# Altium PCB codesanner.PcbDoc
Units mm, origin at the board's own origin, x right, y up, seen from the top; angles counter-clockwise.
Board outline 171.93 x 106.52 mm, 2 copper layers (Top Layer, Bottom Layer); 52 components, 52 nets, 205 pads, 165 vias.
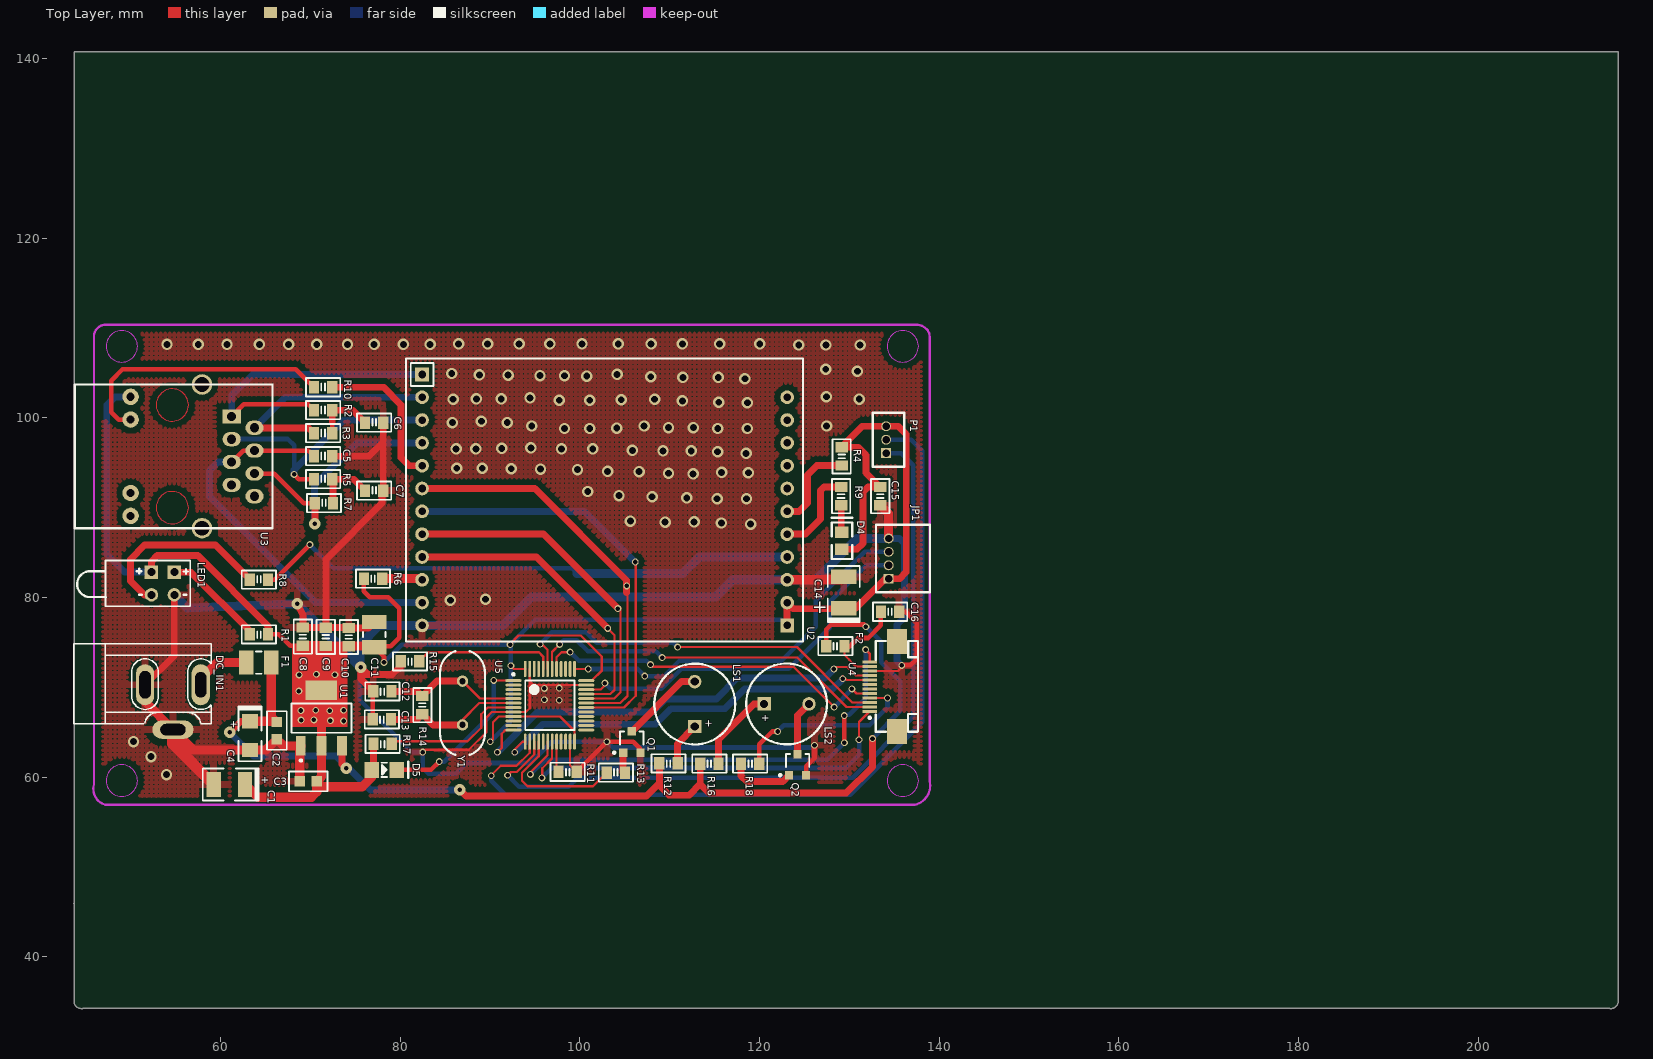
[diagram p0: Top Layer view]
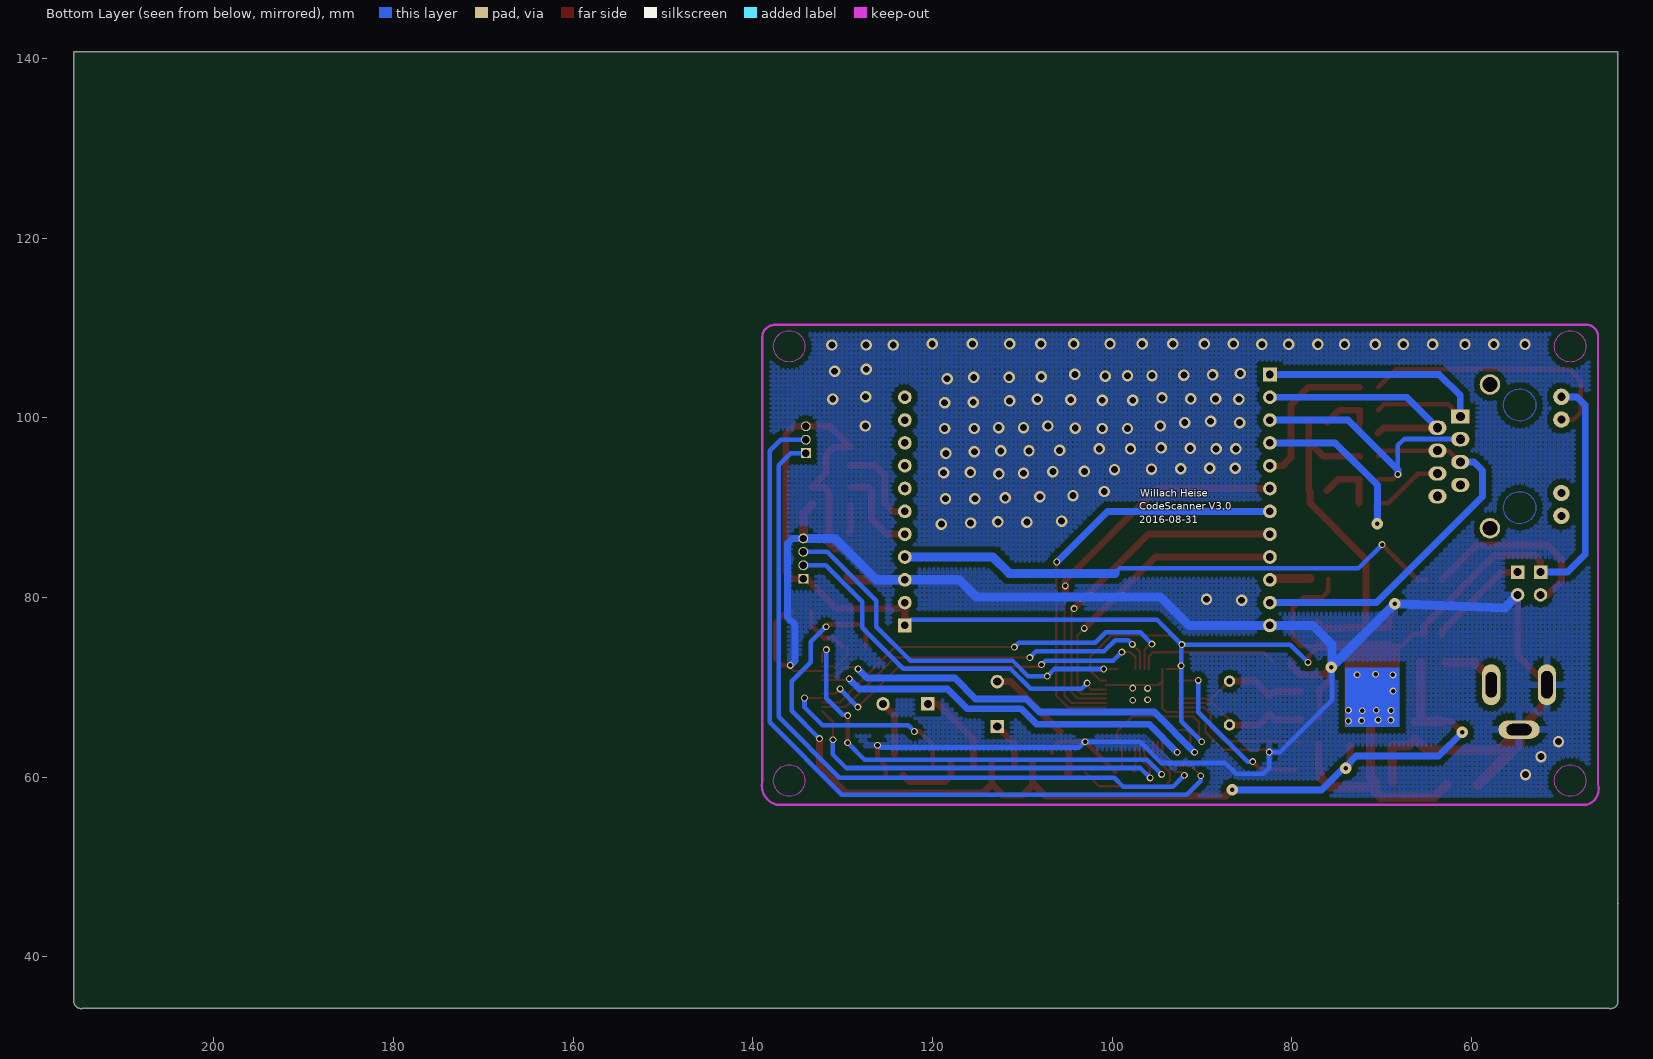
[diagram p1: Bottom Layer view, seen from below]

## Layer stack, top to bottom
Top Solder: solder mask 0.0102, Solder Resist, Dk 3.5
Top Layer: signal copper 0.0356
Dielectric 1: dielectric 0.32, FR-4, Dk 4.8
Bottom Layer: signal copper 0.0356
Bottom Solder: solder mask 0.0102, Solder Resist, Dk 3.5

## Board outline
43.701,34.902 ccw(c44.526,35.073) 44.644,34.239 cw(c44.651,34.189) 44.651,34.24 214.651,34.24 cw(c214.651,34.189) 214.658,34.239 ccw(c214.776,35.073) 215.6,34.902 215.6,45.888 cw(c215.651,45.888) 215.615,45.923 cw(c215.651,45.959) 215.6,45.959 215.6,140.753 43.701,140.753 43.701,45.959 cw(c43.651,45.959) 43.687,45.923 cw(c43.651,45.888) 43.701,45.888

## Design rules (kind name [scope] priority, off if disabled: settings)
Clearance Clearance_1 [InPolygon] p1: gap=0.635
Clearance [All] p2: gap=0.178
PolygonConnect [All] p1: connectstyle=Relief reliefconductorwidth=0.762 reliefentries=4 polygonreliefangle="90 Angle" airgapwidth=0.762
RoutingVias [All] p1: holewidth=0.711 width=1.27 viastyle="Through Hole" minholewidth=0.711 minwidth=1.27 maxholewidth=0.711 maxwidth=1.27
SolderMaskExpansion [All] p1: expansion=0.102
Width [All] p1: maxlimit=5 minlimit=0.254 preferedwidth=0.254
29 further rules are at their usual default settings.

## Components (designator, comment, footprint, x,y, rotation, side; value= is the part's Value field where it differs from the comment)
C1 "Cap Pol3" "B: 3528" 60.985,59.182 r180 top
C2 "Cap" 0805 66.269,65.176 r90 top
C3 "Cap" 0805 69.774,59.538 r0 top
C4 "Cap Pol3" "CAP A-3216" 63.297,64.618 r270 top
C5 "Cap" C0805tan 71.425,95.722 r180 top
C6 "Cap" C0805tan 77.114,99.466 r180 top
C7 "Cap" C0805tan 77.114,91.897 r180 top
C8 "Cap" C0805tan 69.183,75.644 r270 top
C9 "Cap" C0805tan 71.723,75.619 r270 top
C10 "Cap" C0805tan 74.289,75.594 r270 top
C11 "Cap Pol1" 3225[1210] 77.133,75.873 r90 top
C12 "Cap" C0805tan 78.029,69.545 r0 top
C13 "Cap" C0805tan 77.978,66.421 r0 top
C14 "Cap Pol3" "B: 3528" 129.388,80.543 r90 top
C15 "Cap" C0805tan 133.452,91.288 r90 top
C16 "Cap" C0805tan 134.544,78.41 r0 top
D4 "Ready" LED-0805 129.184,85.369 r90 top
D5 "Diode 1N4148" LL34 76.835,60.808 r0 top
DC_IN1 "POW" DC10B 47.142,66.091 r0 top
F1 "Fuse 1A" 3225[1210] 64.262,72.746 r0 top
F2 "Fuse 0.5A" C0805TAN 128.448,74.574 r0 top
JP1 "4 HEADER" CON4_1.5 134.391,84.328 r90 top
LED1 "LED_double_DIP" LED_double 52.324,82.829 r0 top
LS1 "Bell" Bell 112.801,65.634 r90 top
LS2 "Bell" Bell 120.523,68.148 r0 top
P1 "Header 3" CON3_1.5 134.112,97.561 r90 top
Q1 "S8050" SOT-23 105.791,63.906 r0 top
Q2 "S8050" SOT-23 124.257,61.392 r0 top
R1 "Res2" C0805TAN 64.287,75.895 r0 top
R2 "Res2" C0805TAN 71.425,100.843 r180 top
R3 "Res2" C0805TAN 71.425,98.283 r180 top
R4 "Res2" C0805TAN 129.159,95.707 r90 top
R5 "Res2" C0805TAN 71.425,93.167 r180 top
R6 "Res2" C0805TAN 76.987,82.093 r0 top
R7 "Res2" C0805TAN 71.526,90.5 r180 top
R8 "Res2" C0805TAN 64.287,81.991 r180 top
R9 "Res2" C0805TAN 129.108,91.288 r270 top
R10 "Res2" C0805TAN 71.425,103.403 r180 top
R11 "Res2" C0805tan 98.654,60.579 r0 top
R12 "Res2" C0805TAN 109.88,61.519 r0 top
R13 "Res2" C0805TAN 104.013,60.503 r180 top
R14 "Res2" C0805tan 82.474,68.021 r270 top
R15 "Res2" C0805tan 81.102,72.873 r0 top
R16 "Res2" C0805TAN 114.427,61.493 r0 top
R17 "Res2" C0805tan 78.054,63.703 r0 top
R18 "Res2" C0805TAN 118.974,61.493 r0 top
U1 "AMS1117-3.3" SOT223 71.247,66.573 r0 top
U2 "USR-WIFI232-D2" USR-WIFI232-D2 82.448,104.826 r180 top
U3 "HR911105A" HR911105A 56.896,95.707 r180 top
U4 "CR8000_12PIN" CR8000_12PIN 133.401,70.079 r90 top
U5 "STM32F103C8T6" LQFP48 96.672,67.996 r0 top
Y1 "8MHz" XTAL_US 86.944,70.688 r270 top

## Footprints (in the part's own frame and the unit in brackets; to place one, negate y for a bottom-side part, rotate by r counter-clockwise, add the part's x,y. Pads: shape width x height; smd on the part's side, far side on the other; paste and mask are expansions set on the pad)
0805 [mm] "1.14mm,1.2mm,3.05mm"
  rect 1.14x1.2 smd: 1(-0.95,0) 2(0.95,0)
  silkscreen extent -2.13,-1.12 2.16,1.09
3225[1210] [mm] "Chip Resistor; Body 3.2 x 2.5 mm (LxW typ)"
  rect 1.6x2.7 smd: 1(-1.4,0) 2(1.4,0)
  silkscreen extent -0.3,-1.25 0.3,1.25
"B: 3528" [mm] "钽电容B型"
  rect 1.6x2.8 smd: 1(-1.75,0) 2(1.75,0)
  silkscreen extent -3.27,-1.78 2.95,1.78
Bell [mm]
  rect 1.5x1.5 hole 0.9: 1(0,0)
  round 1.5 hole 0.9: 2(5,0)
  silkscreen extent -2,-4.5 7,4.5
C0805tan [mil]
  rect 45x55 smd: 1(-40,0) 2(40,0)
  silkscreen extent -75,-40 75,40
C0805TAN [mil]
  rect 45x55 smd: 1(-40,0) 2(40,0)
  silkscreen extent -75,-40 75,40
"CAP A-3216" [mm]
  rect 1.6x1.8 smd: 1(-1.6,0) 2(1.6,0)
  silkscreen extent -3.25,-1.27 2.85,1.27
CON3_1.5 [mm]
  rect 1.1x1.1 hole 0.8: 1(-1.5,0)
  round 1.1 hole 0.8: 2(0,0) 3(1.5,0)
  silkscreen extent -3,-2 3,1.5
CON4_1.5 [mm]
  rect 1.1x1.1 hole 0.8: 1(-2.25,0)
  round 1.1 hole 0.8: 2(-0.75,0) 3(0.75,0) 4(2.25,0)
  silkscreen extent -3.75,-4.6 3.75,1.4
CR8000_12PIN [mm]
  rect 0.3x1.6 smd: 1(-2.771,1.13) 2(-2.271,1.13) 3(-1.771,1.13) 4(-1.271,1.13) 5(-0.771,1.13) 6(-0.271,1.13) 7(0.229,1.13) 8(0.729,1.13) 9(1.229,1.13) 10(1.729,1.13) 11(2.229,1.13) 12(2.729,1.13)
  rect 2.8x2.2 smd: 13(-5.004,-1.905) 14(5.004,-1.905)
  silkscreen extent -5.03,-4.27 5.08,1.25
DC10B [mil]
  oval 80x180 hole 50 slot 110 at 90 deg: 1(420.09,165)
  oval 80x180 hole 50 slot 120 at 90 deg: 2(176,165)
  oval 180x80 hole 50 slot 110 at 0 deg: 3(298.05,-31.85)
  silkscreen extent -137,-5 466,345
HR911105A [mil]
  rect 80x62 hole 40: 1(-171.46,-175.2)
  oval 80x62 hole 40: 2(-271.46,-125.2) 3(-171.46,-75.2) 4(-271.46,-25.2) 5(-171.46,24.8) 6(-271.46,74.8) 7(-171.46,124.8) 8(-271.46,174.8)
  round 72 hole 36: 9(271.46,-260.83) 10(271.46,-161.2) 11(271.46,160.67) 12(271.46,260.8)
  round 90 hole 65: 13(-41.54,-314.96) 14(-41.54,314.96)
  Multi-Layer circle w5: c88.54,-225.2 r70.8
  Multi-Layer circle w5: c88.54,224.8 r70.8
  silkscreen extent -350,-315 516,315
LED-0805 [mm]
  rect 1.3x1.5 smd: 1(0,0) 2(1.9,0)
  silkscreen extent -1.08,-1.14 3.49,1.14
LED_double [mm]
  rect 1.5x1.5 hole 0.9: 1(0,0) 4(2.54,0)
  round 1.5 hole 0.9: 2(0,-2.54) 3(2.54,-2.54)
  silkscreen extent -8.27,-3.81 4.32,1.27
LL34 [mm]
  rect 1.6x1.8 smd: 1(0,0) 2(2.8,0)
  silkscreen extent 1.1,-0.89 4.07,0.89
LQFP48 [mm]
  oval 1.8x0.3 smd: 1(-4.05,2.75) 2(-4.05,2.25) 3(-4.05,1.75) 4(-4.05,1.25) 5(-4.05,0.75) 6(-4.05,0.25) 7(-4.05,-0.25) 8(-4.05,-0.75) 9(-4.05,-1.25) 10(-4.05,-1.75) 11(-4.05,-2.25) 12(-4.05,-2.75) 25(4.05,-2.75) 26(4.05,-2.25) 27(4.05,-1.75) 28(4.05,-1.25) 29(4.05,-0.75) 30(4.05,-0.25) 31(4.05,0.25) 32(4.05,0.75) 33(4.05,1.25) 34(4.05,1.75) 35(4.05,2.25) 36(4.05,2.75)
  oval 0.3x1.8 smd: 13(-2.75,-4.05) 14(-2.25,-4.05) 15(-1.75,-4.05) 16(-1.25,-4.05) 17(-0.75,-4.05) 18(-0.25,-4.05) 19(0.25,-4.05) 20(0.75,-4.05) 21(1.25,-4.05) 22(1.75,-4.05) 23(2.25,-4.05) 24(2.75,-4.05) 37(2.75,4.05) 38(2.25,4.05) 39(1.75,4.05) 40(1.25,4.05) 41(0.75,4.05) 42(0.25,4.05) 43(-0.25,4.05) 44(-0.75,4.05) 45(-1.25,4.05) 46(-1.75,4.05) 47(-2.25,4.05) 48(-2.75,4.05)
  silkscreen extent -4.17,-2.75 2.75,3.57, body extent -3.5,-3.5 3.5,3.5, height 1.6
SOT223 [mm] "SOT-223/SC-73; 4 Leads; Body 6.7 x 7.3 mm, inc. leads (LxW max)"
  rect 1.1x2.15 smd: 1(-2.3,-3.1) 2(0,-3.1) 3(2.3,-3.1)
  rect 3.5x2.15 smd: 4(0,3.1)
  silkscreen extent -3.35,-4.85 3.35,1.63
SOT-23 [mm]
  rect 0.9x0.95 smd: 1(-0.95,-1.175) 2(0.95,-1.175) 3(0,1.175)
  silkscreen extent -2.07,-1.3 1.3,1.18
USR-WIFI232-D2 [mil]
  rect 60x60 hole 33.47: 1(0,0) 13(-1600,1100)
  round 60 hole 33.47: 2(0,100) 3(0,200) 4(0,300) 5(0,400) 6(0,500) 7(0,600) 8(0,700) 9(0,800) 10(0,900) 11(0,1000) 12(0,1100) 14(-1600,1000) 15(-1600,900) 16(-1600,800) 17(-1600,700) 18(-1600,600) 19(-1600,500) 20(-1600,400) 21(-1600,300) 22(-1600,200) 23(-1600,100)
  silkscreen extent -1670,-70 70,1170
XTAL_US [mil]
  round 50 hole 28: 1(0,0) 2(192.13,0)
  silkscreen extent -131,-98 323,98

## Part data
C1 C4 C14: "Polarized Capacitor (Surface Mount)"
C2 C3 C5 C6 C7 C8 C9 C10 C12 C13 C15 C16: "Capacitor"
C11: "Polarized Capacitor (Radial)"
D4: library part LED2, "Typical RED, GREEN, YELLOW, AMBER GaAs LED"
D5: "High Conductance Fast Diode"
F1 F2: library part "Fuse 1", "Fuse"
JP1: "4 Pin Header"
LS1 LS2: "Electrical Bell"
P1: "Header, 3-Pin"
Q1 Q2: library part MMBT3904
R1 R2 R3 R4 R5 R6 R7 R8 R9 R10 R11 R12 R13 R14 R15 R16 R17 R18: "Resistor"
U1: library part AMS1117-5
Y1: library part XTAL, "Crystal Oscillator"

## Via types
v1: diameter 1.27, hole 0.762, Top Layer to Bottom Layer, 100 vias
v2: diameter 0.762, hole 0.508, Top Layer to Bottom Layer, 59 vias
v3: diameter 1.27, hole 0.508, Top Layer to Bottom Layer, 6 vias

## Nets (pads, with @x,y where several pads share a name; then routed paths per layer and width w, separated by ;. In a path a pad name is that pad's centre, name@x,y a point inside that pad or via, vN(x,y) a via of type N, cw(c..) or ccw(c..) an arc to the next point about the centre after c; other vN are vias at no path point)
1V8: C5.2 U2.11 U3.4 U3.5 | length 44.6
  Top Layer w0.508: U3.5 62.521,96.347 U3.4 ; U3.4@63.435,96.322 69.809,96.322 C5.2
  Bottom Layer w0.762: U3.5 59.746,95.077 58.776,94.107 58.776,91.211 70.561,79.426 U2.11
+3.3V: C1.1 C3.2 C8.2 C9.2 C10.2 C11.1 C14.1 C15.2 D4.1 D5.1 JP1.1 LED1.1 P1.3 R1.2 R4.2 R6.1 R17.1 U1.2 U1.4 U2.13 U2.14 U3.9 U5.9 U5.24 U5.36 U5.48 | length 256.1
  Top Layer w0.254: v2(90.043,63.932) 90.348,64.237 90.348,66.116 90.977,66.746 U5.9 97.795,66.746 99.422,65.119 U5.24 ; v2(92.253,74.752) 92.253,74.828 93.193,75.768 100.101,75.768 102.464,73.406 102.464,71.882 101.327,70.746 U5.36 ; v2(92.329,72.39) 92.673,72.046 U5.48
  Top Layer w0.508: R1.2 66.497,75.895 67.764,74.628 C8.2 ; R6.1 75.971,80.67 76.606,80.035 78.664,80.035 79.908,78.791 79.908,75.514 78.972,74.578 77.029,74.578 C11.1 78.207,73.4 v2(78.207,72.771)
  Top Layer w0.762: LED1.1 52.324,84.023 52.959,84.658 57.48,84.658 65.303,76.835 R1.2 ; D5.1@77.038,61.011 R17.1 ; U2.13 U2.14 123.774,78.74 129.334,78.74 C14.1 130.686,78.793 133.97,82.078 JP1.1 135.596,82.078 136.347,82.829 136.347,98.171 135.457,99.061 P1.3 131.497,99.061 R4.2 130.988,96.723 131.877,95.834 131.877,93.878 C15.2 132.105,92.304 131.521,91.719 131.521,86.03 130.861,85.369 D4.1
  Top Layer w1.016: C1.1 64.158,57.76 70.129,57.76 70.724,58.354 C3.2 ; C8.2 71.698,74.628 C9.2 ; D5.1 76.835,59.969 75.794,58.928 71.333,58.928 C3.2 ; C11.1@77.029,74.578 C10.2 74.263,74.603 C9.2 ; C3.2 71.247,60.061 U1.2 U1.4 71.247,74.127 C9.2
  Bottom Layer w0.508: v2(78.207,72.771) 80.188,74.752 v2(92.253,74.752) ; v2(90.043,63.932) 92.329,66.218 v2(92.329,72.39) 92.329,74.676 v2(92.253,74.752) ; U2.13 122.453,77.521 95.021,77.521 v2(92.253,74.752)
  Bottom Layer w0.762: U3.9 48.256,102.332 47.346,101.422 47.346,84.785 49.301,82.829 LED1.1
  other v2: 73.711,66.243 72.238,66.294 68.986,66.345 70.409,66.37 72.161,67.386 68.961,67.412 70.612,67.437 73.711,67.437 68.732,69.571 68.758,71.374 72.746,71.399 70.688,71.45
+5V: C2.2 C4.1 F1.2 F2.1 R12.1 R16.1 U1.3 | length 122.9
  Top Layer w0.508: F2.1@127.2,74.498 F2.1@127.2,74.574 ; F2.1 127.432,76.429 127.991,76.987 131.648,76.987 131.902,76.733 v2(131.851,76.733)
  Top Layer w0.762: v3(61.036,64.973) 62.281,66.218 C4.1 ; U1.3 73.547,61.429 v3(73.99,60.985) ; v3(86.639,58.572) 87.325,57.887 107.417,57.887 108.864,59.334 ; R12.1 108.864,59.334 ; R16.1 113.411,59.207 ; v2(132.588,64.287) 132.588,61.138 129.667,58.217 114.402,58.217 113.411,59.207 ; 108.864,59.334 108.864,59.055 109.931,57.988 112.192,57.988 113.411,59.207
  Top Layer w1.016: C4.1 C2.2@66.177,66.218 ; F1.2 65.662,66.733 C2.2@66.177,66.218 ; C2.2 C2.2@66.177,66.218
  Bottom Layer w0.508: v2(131.851,76.733) 131.902,76.733 133.579,75.057 133.579,72.771 135.687,70.663 135.687,67.386 v2(132.588,64.287)
  Bottom Layer w0.762: v3(61.036,64.973) 63.678,62.332 72.847,62.332 v3@73.99,61.189 ; v3@73.99,61.29 76.708,58.572 v3(86.639,58.572)
+5V_CODE: C16.1 F2.2 U4.11 | length 10.3
  Top Layer w0.254: F2.2 129.464,73.609 130,73.073 130.766,72.307 U4.11
  Top Layer w0.508: F2.2@130,74.498 130.991,75.489 132.105,75.489 133.528,76.911 C16.1
+5V_IN: DC_IN1.1 F1.1 | length 6.5
  Top Layer w1.016: DC_IN1.1 57.813,70.945 59.614,72.746 F1.1
BEEP_CODE: R18.2 U4.4 | length 21.2
  Top Layer w0.254: U4.4 134.263,68.807 v2(134.264,68.809)
  Top Layer w0.508: R18.2 119.99,63.652 121.412,65.075 v2(122.022,65.075)
  Bottom Layer w0.508: v2@121.996,65.049 v2(122.022,65.075) 122.707,65.761 132.258,65.761 134.264,67.767 v2(134.264,68.809)
BEEP_PA6: R13.2 U5.16 | length 15.4
  Top Layer w0.254: U5.16 95.422,62.326 93.574,60.477 93.574,59.588 94.183,58.979 101.473,58.979 R13.2
CTS1: U2.8 U5.32 | length 38.4
  Top Layer w0.254: U5.32 103.849,68.746 104.546,69.444 104.546,78.537
  Top Layer w0.762: U2.8 95.961,87.046 v2(104.242,78.765)
ETH7: U3.7
ETH8: U3.8
G_LED_PA4: P1.2 U5.14 | length 93.9
  Top Layer w0.254: v2(90.145,60.147) 90.145,60.198 91.211,61.265 92.964,61.265 94.422,62.723 U5.14
  Bottom Layer w0.508: v2(90.145,60.147) 90.145,59.614 91.719,58.039 130.099,58.039 138.151,66.091 138.151,96.317 136.906,97.561 P1.2
GND: C1.2 C2.1 C3.1 C4.2 C5.1 C6.1 C7.1 C8.1 C9.1 C10.1 C11.2 C12.1 C13.1 C14.2 C15.1 C16.2 DC_IN1.2 DC_IN1.3 JP1.4 LED1.3 Q1.2 Q2.2 R11.2 R15.1 U1.1 U2.12 U2.15 U4.10 U5.8 U5.23 U5.35 U5.47 | length 332.8
  Top Layer w0.254: v2(82.525,62.789) 82.779,63.043 87.655,63.043 89.611,64.999 89.611,66.65 90.207,67.246 U5.8 93.992,67.246 94.422,67.676 94.422,70.688 ; U5.47 94.422,70.688 ; U5.23 98.922,61.326 R11.2 ; U5.35 94.865,70.246 94.422,70.688 ; U4.10 135.434,71.807 135.839,72.212 v2(135.839,72.441)
  Top Layer w0.508: C13.1 76.962,69.494 C12.1 ; R11.2 v2(103.022,63.932) 105.969,63.932 106.741,63.16 Q1.2 ; Q2.2 125.207,61.199 126.136,62.128 v2(126.136,63.551) ; C16.2 136.296,78.41 137.516,77.191 137.516,73.152 136.804,72.441 v2(135.839,72.441)
  Top Layer w0.762: DC_IN1.2 54.864,73.533 LED1.3 ; v3(68.555,79.299) 69.183,78.086 C8.1 C9.1@71.755,76.66 ; C5.1 76.52,95.722 78.13,97.333 ; C12.1 75.641,70.917 v3(75.641,72.212) ; C11.2 76.47,76.61 C10.1 74.238,76.66 C9.1@71.755,76.66 ; C6.1 78.13,97.333 ; R15.1 80.086,72.39 79.121,71.425 76.429,71.425 ; C9.1@71.755,76.66 71.755,84.252 78.003,90.5 78.003,91.77 C7.1 78.13,97.333 ; v3(75.641,72.212) 75.844,71.425 76.429,71.425 ; v3(75.641,72.212) 76.429,71.425
  Top Layer w1.016: DC_IN1.2 51.613,68.382 DC_IN1.3 ; 55.78,64.215 56.977,63.018 C4.2 65.06,63.018 C2.1 67.022,63.473 U1.1 68.824,63.35 C3.1 ; U2.15 129.06,81.966 C14.2 ; C15.1 134.391,89.332 JP1.4
  Top Layer w1.27: DC_IN1.3 54.713,63.705 C1.2
  Bottom Layer w0.508: v3(75.641,72.212) 75.54,72.111 75.54,68.555 81.305,62.789 v2(82.525,62.789) 82.525,61.011 83.16,60.376 86.208,60.376 87.401,61.57 94.539,61.57 96.901,63.932 v2(103.022,63.932) 103.657,63.297 125.882,63.297 v2(126.136,63.551)
  Bottom Layer w0.762: JP1.4 135.596,86.578 136.144,86.03 136.144,77.775 135.331,76.962 135.331,72.949 v2(135.839,72.441)
  Bottom Layer w1.016: LED1.3 56.337,78.816 v3(68.555,79.299) v3@75.54,72.314 ; v3(75.641,72.212) v3@75.54,72.314 ; JP1.4 130.876,86.578 126.263,81.966 U2.15 117.043,81.966 115.113,80.035 94.615,80.035 91.465,76.886 U2.12 77.673,76.886 75.54,74.752 v3@75.54,72.314
  other v1: 54,60.274 52.273,62.281 50.317,63.957 85.598,79.68 89.51,79.807 119.024,88.163 115.773,88.29 109.499,88.392 112.725,88.417 105.639,88.494 115.291,90.983 118.567,90.983 111.912,91.084 108.052,91.211 104.369,91.338 100.889,91.796 112.624,93.751 109.88,93.828 118.77,93.878 115.799,93.929 106.604,94.005 103.099,94.031 99.746,94.234 95.631,94.285 92.38,94.336 86.309,94.386 89.154,94.386 118.516,96.037 115.341,96.215 109.271,96.317 112.42,96.317 105.867,96.368 86.233,96.545 88.443,96.545 97.968,96.545 101.448,96.545 91.313,96.596 94.564,96.647 98.298,98.806 101.117,98.806 115.367,98.806 118.669,98.806 104.115,98.857 109.88,98.908 112.649,98.908 94.666,99.085 107.163,99.085 127.483,99.085 85.827,99.466 91.923,99.466 89.052,99.619 118.669,101.676 115.468,101.727 111.43,101.879 97.714,101.956 101.117,101.956 104.623,102.006 85.903,102.057 108.331,102.057 131.115,102.083 88.494,102.108 91.262,102.108 94.463,102.21 127.457,102.337 118.389,104.343 111.481,104.496 115.418,104.496 107.899,104.572 100.787,104.648 98.298,104.673 95.58,104.699 92.024,104.75 88.824,104.775 104.165,104.826 85.75,104.927 130.912,105.181 127.381,105.41 124.384,108.102 127.406,108.102 131.216,108.102 54.051,108.179 57.531,108.179 60.731,108.179 64.338,108.179 67.589,108.179 70.714,108.179 74.143,108.179 77.114,108.179 80.366,108.179 83.337,108.179 86.512,108.229 89.738,108.229 93.243,108.229 96.672,108.229 100.254,108.229 104.292,108.229 107.95,108.229 111.43,108.229 115.57,108.229 120.04,108.229
  other v2: 97.714,68.555 96.063,68.605 96.063,69.875 97.714,69.901
NET1_LED: R10.1 U2.5 | length 17.1
  Top Layer w0.762: R10.1 78.156,103.403 80.112,101.448 80.112,95.555 81.001,94.666 U2.5
NetC6_2: C6.2 R2.1 R3.1 | length 6.8
  Top Layer w0.508: R3.1 72.441,99.492
  Top Layer w0.762: 72.441,99.492 R2.1 74.722,100.843 C6.2
NetC7_2: C7.2 R5.1 R7.1 | length 6.9
  Top Layer w0.762: R7.1 72.542,93.066 R5.1 74.828,93.167 C7.2
NetC12_2: C12.2 R14.1 U5.5 Y1.1 | length 15.3
  Top Layer w0.254: Y1.1 88.887,68.746 U5.5
  Top Layer w0.762: C12.2 81.966,69.545 R14.1 84.125,70.688 Y1.1
NetC13_2: C13.2 R14.2 U5.6 Y1.2 | length 15.7
  Top Layer w0.254: Y1.2 86.944,66.367 88.823,68.246 U5.6
  Top Layer w0.762: C13.2 81.89,66.421 R14.2 83.671,65.808 Y1.2
NetD4_2: D4.2 R9.2 | length 3
  Top Layer w0.762: R9.2 129.108,87.346 D4.2
NetD5_2: D5.2 U5.1 | length 19.2
  Top Layer w0.254: v2(90.424,70.764) 90.443,70.746 U5.1
  Top Layer w0.508: D5.2 83.439,60.808 v2(84.353,61.722)
  Bottom Layer w0.508: v2(84.353,61.722) 84.912,61.722 90.424,67.234 v2(90.424,70.764)
NetLED1_4: LED1.4 R1.1 | length 11.5
  Top Layer w0.762: LED1.4 54.889,82.804 56.718,82.804 63.271,76.251 R1.1
NetLS1_1: LS1.1 R12.2 | length 4.9
  Top Layer w0.762: R12.2 110.871,61.544 110.871,63.703 LS1.1
NetLS1_2: LS1.2 Q1.3 | length 9.3
  Top Layer w0.762: Q1.3 111.343,70.634 LS1.2
NetLS2_1: LS2.1 R16.2 | length 9.4
  Top Layer w0.762: R16.2 115.443,64.211 119.38,68.148 LS2.1
NetLS2_2: LS2.2 Q2.3 | length 6.1
  Top Layer w0.762: Q2.3 124.257,66.882 LS2.2
NetQ1_1: Q1.1 R13.1 | length 4.5
  Top Layer w0.762: R13.1@104.826,60.528 104.826,62.716 Q1.1 104.841,60.691 R13.1
NetQ2_1: Q2.1 R18.1 | length 7.3
  Top Layer w0.762: R18.1 117.958,60.147 118.593,59.512 122.602,59.512 Q2.1
NetR4_1: R4.1 U2.18 | length 10
  Top Layer w0.762: U2.18 124.409,89.586 125.349,90.526 125.349,93.65 126.39,94.691 R4.1
NetR6_2: R6.2 U2.10 | length 4.5
  Top Layer w1.016: R6.2 82.321,82.093 U2.10
NetR8_1: R8.1 U2.16 | length 61.8
  Top Layer w0.508: R8.1@64.999,81.991 R8.1 66.065,81.991 v2(69.952,85.877)
  Bottom Layer w0.508: v2(69.952,85.877) 72.593,83.236 99.136,83.236 99.695,82.677
  Bottom Layer w1.016: 99.695,82.677 111.481,82.677 113.309,84.506 U2.16
NetR9_1: R9.1 U2.17 | length 10.1
  Top Layer w0.762: U2.17 125.12,87.046 126.797,88.722 126.797,91.897 127.203,92.304 R9.1
NetR10_2: R10.2 U3.10 | length 30
  Top Layer w0.508: U3.10 48.661,99.802 47.828,100.635 47.828,104.14 49.098,105.41 68.402,105.41 R10.2
NetR11_1: R11.1 U5.20 | length 3.5
  Top Layer w0.254: U5.20 97.422,60.794 R11.1
NetR15_2: R15.2 U5.44 | length 15.8
  Top Layer w0.254: R15.2 83.16,73.914 95.428,73.914 95.922,73.419 U5.44
NetR17_2: R17.2 U5.7 | length 16.1
  Top Layer w0.254: R17.2 79.35,63.983 87.503,63.983 89.027,65.507 89.027,67.005 89.768,67.746 U5.7
NGOODREAD_PB7: U4.3 U5.43 | length 43.8
  Top Layer w0.254: v2@95.428,74.651 95.944,74.651 96.422,74.172 U5.43 ; v2(110.896,74.473) 124.181,74.473 130.346,68.307 U4.3
  Bottom Layer w0.508: v2(95.58,74.803) 96.901,76.124 100.736,76.124 101.905,74.955 110.414,74.955 v2(110.896,74.473)
NWEAKUP_PB6: U4.2 U5.42 | length 40.9
  Top Layer w0.254: U5.42 96.922,73.935 v2(97.765,74.778) ; v2(109.169,73.304) 124.206,73.304 129.703,67.807 U4.2
  Bottom Layer w0.508: v2(97.765,74.778) 98.222,75.235 99.67,75.235 100.914,73.99 108.483,73.99 v2(109.169,73.304)
POLARITY_PB0: U4.12 U5.18 | length 54.1
  Top Layer w0.254: v2(94.513,60.3) 94.513,60.528 96.422,62.437 U5.18 ; v2(131.826,74.193) 132.271,73.749 U4.12
  Top Layer w0.508: v2(129.438,66.853) 129.438,63.856 v2(129.464,63.83)
  Bottom Layer w0.508: v2(94.513,60.3) 96.164,61.951 127.584,61.951 v2(129.464,63.83) ; v2(129.438,66.853) 129.515,66.929 129.997,66.929 131.826,68.758 v2(131.826,74.193)
PWRDWN_PB5: U4.5 U5.41 | length 40
  Top Layer w0.254: U5.41 97.422,73.343 97.993,73.914 v2(98.933,73.914) ; v2(107.874,72.517) 108.102,72.288 123.8,72.288 126.997,69.091 127.022,69.091 v2(128.321,67.793) ; v2(130.302,69.825) 130.819,69.307 U4.5
  Bottom Layer w0.508: v2(98.933,73.914) 99.873,72.974 107.417,72.974 v2(107.874,72.517) ; v2(128.321,67.793) 130.302,69.774 v2(130.302,69.825)
R_LED_PA5: P1.1 U5.15 | length 85.9
  Top Layer w0.254: v2(91.973,60.198) 92.354,60.579 92.989,60.579 94.922,62.512 U5.15
  Bottom Layer w0.508: v2(91.973,60.198) 93.269,58.903 98.755,58.903 99.797,59.944 130.378,59.944 137.135,66.7 137.135,94.717 135.79,96.061 P1.1
RTS1: U2.9 U5.33 | length 34.4
  Top Layer w0.254: U5.33 103.409,69.246 103.861,69.698 103.861,75.794 v2@103.111,76.543
  Top Layer w0.762: U2.9 95.174,84.506 v2(103.124,76.556)
RX1+: R5.2 U2.3 U3.3 | length 29.5
  Top Layer w0.508: v2(68.199,93.701) 68.732,93.167 R5.2
  Bottom Layer w0.508: U3.3 61.271,97.638 67.488,97.638 68.199,96.926 68.199,94.209
  Bottom Layer w0.762: v2(68.199,93.701) 68.199,94.209 73.736,99.746 U2.3
RX1-: R7.2 U2.4 U3.6 | length 37.7
  Top Layer w0.508: U3.6 63.816,93.782 66.01,93.782 69.291,90.5 R7.2
  Top Layer w0.762: v3(70.485,88.214) 70.51,88.24 R7.2
  Bottom Layer w0.762: 73.863,95.936 70.46,92.532 70.46,88.24 v3(70.485,88.214) 70.485,92.507 75.184,97.206 U2.4
RXD1: U2.6 U5.31 | length 45.5
  Top Layer w0.254: U5.31 104.517,68.246 105.308,69.037 105.308,80.543
  Top Layer w0.762: U2.6 94.996,92.126 105.207,81.915 105.207,80.543 105.232,80.569 v2(105.232,81.28)
RXD2_PA3: U4.8 U5.13 | length 45.2
  Top Layer w0.254: v2(92.761,62.763) 92.761,63.068 93.638,63.946 U5.13 ; v2(129.286,70.942) 129.286,71.222 129.7,70.807 U4.8
  Bottom Layer w0.762: v2(92.761,62.763) 92.786,62.763 95.91,65.888 108.458,65.888 110.185,67.615 116.18,67.615 118.364,69.799 128.143,69.799 v2(129.286,70.942)
TCK/SWCLK: JP1.3 U5.37 | length 42.7
  Top Layer w0.254: U5.37 100.928,72.046 v2(100.94,72.034)
  Bottom Layer w0.508: v2(100.94,72.034) 106.451,72.034 v2(107.239,71.247) 109.379,71.247 111.106,72.974 122.479,72.974 126.263,76.759 126.263,79.629 131.712,85.078 JP1.3
TMS/SWDIO: JP1.2 U5.34 | length 41.8
  Top Layer w0.254: U5.34 102.334,69.746 102.794,70.206 v2(102.794,70.46)
  Bottom Layer w0.508: v2(102.794,70.46) 103.429,69.825 109.093,69.825 111.328,72.06 123.266,72.06 127.813,76.606 127.813,79.502 131.889,83.578 JP1.2
TRIGGER_PB1: U4.1 U5.19 | length 46.2
  Top Layer w0.254: v2@95.834,59.969 95.834,60.985 96.922,62.074 U5.19 ; v2(131.089,64.16) 131.089,66.126 U4.1
  Bottom Layer w0.508: v2(95.783,59.919) 96.876,61.011 129.616,61.011 131.14,62.535 131.14,64.11 v2(131.089,64.16)
TX1+: R2.2 U2.1 U3.1 | length 34.5
  Top Layer w0.508: U3.1 62.592,101.498 69.753,101.498 R2.2
  Bottom Layer w0.762: U3.1 61.251,102.475 63.602,104.826 U2.1
TX1-: R3.2 U2.2 U3.2 | length 26.9
  Top Layer w0.762: U3.2 63.816,98.862 69.83,98.862 R3.2
  Bottom Layer w0.762: U3.2 67.19,102.286 U2.2
TXD1: U2.7 U5.30 | length 47
  Top Layer w0.254: U5.30 104.931,67.746 106.248,69.063 106.248,83.871 v2(106.172,83.947)
  Bottom Layer w0.762: U2.7 100.533,89.586 v2(106.172,83.947)
TXD2_PA2: U4.9 U5.12 | length 49.5
  Top Layer w0.254: v2(90.83,62.763) 91.313,63.246 91.313,64.821 91.738,65.246 U5.12 ; v2(128.295,72.034) 128.524,72.263 129.769,72.263 130.724,71.307 U4.9
  Bottom Layer w0.762: v2(90.83,62.763) 95.301,67.234 108.102,67.234 109.576,68.707 115.214,68.707 117.526,71.018 127.279,71.018 v2(128.295,72.034)
WIFI_LINK: LED1.2 R8.2 | length 20.9
  Top Layer w0.762: LED1.2 51.537,80.289 49.987,81.839 49.987,84.252 51.562,85.827 59.436,85.827 R8.2
pads on no net: U2.19 U2.20 U2.21 U2.22 U2.23 U3.11 U3.12 U3.13 U3.14 U4.6 U4.7 U4.13 U4.14 U5.2 U5.3 U5.4 U5.10 U5.11 U5.17 U5.21 U5.22 U5.25 U5.26 U5.27 U5.28 U5.29 U5.38 U5.39 U5.40 U5.45 U5.46

## Polygon pours and split planes (outlines as drawn)
GND on Top Layer "Top Layer-No Net" (hatched 90Degree grid 0.508 track 0.381, remove dead copper, pour order 4): 47.015,110.338 47.142,110.211 137.693,110.211 137.897,110.211 139.167,108.941 138.963,108.737 138.963,58.445 138.963,58.242 137.643,56.921 47.168,56.921 47.168,57.633 45.949,58.852 46.076,58.979 46.076,110.211 46.863,110.211 47.142,110.49
GND on Bottom Layer "Top Layer-No Net" (hatched 90Degree grid 0.508 track 0.381, remove dead copper, pour order 6): 47.219,110.414 47.269,110.363 137.443,110.363 137.947,110.363 139.09,109.22 139.09,58.318 138.963,58.318 137.566,56.921 137.312,57.175 46.939,57.175 46.939,58.115 46.076,58.979 45.745,59.309 45.745,109.068 47.092,110.414

## Keep-outs
Keep-Out Layer:
  circle w0.1: c49.022,107.95 r1.75
  circle w0.1: c49.022,59.614 r1.75
  circle w0.1: c135.966,107.95 r1.75
  circle w0.1: c135.966,59.614 r1.75
  lines w0.254: 45.923,59.157 ccw(c47.663,58.661) 47.168,56.921 137.306,56.921 ccw(c136.827,59.058) 138.963,59.538 138.963,109.022 ccw(c137.749,109.022) 138.608,109.88 ccw(c137.443,108.715) 137.443,110.363 47.429,110.363 ccw(c47.267,109.019) 45.923,109.18 45.923,59.157

## Other copper
Top Layer:
  rectangle net +3.3V: 67.97,65.583 74.143,74.879
Bottom Layer:
  rectangle net +3.3V: 67.996,65.557 74.117,72.187

## Silkscreen, mask and mechanical layers (free items; w line width, h text height)
Bottom Overlay:
  text "Willach Heise" at 96.901,91.237 h0.8
  text "CodeScanner V3.0" at 96.977,89.764 h0.8
  text "2016-08-31" at 96.977,88.24 h0.8

## Text inside footprints (layer, text, board x,y; h text height)
C1: Top Overlay "+" at 65.43,59.969 h0.8 r180
C4: Top Overlay "+" at 61.138,66.319 h0.8 r270
C14: Top Overlay "+" at 127.406,78.029 h1.5 r90
LS1: Top Overlay "+" at 114.681,65.481 h0.8 r90
LS2: Top Overlay "+" at 120.218,66.192 h0.8